# Altium PCB ecupcb.PcbDoc (part 1 of 2)
Units mil, origin at the board's own origin, x right, y up, seen from the top; angles counter-clockwise.
Board outline 2295 x 3625 mil, 2 copper layers (Top Layer, Bottom Layer); 63 components, 47 nets, 207 pads, 33 vias.
Unrouted connection lines stored in the file: 1.
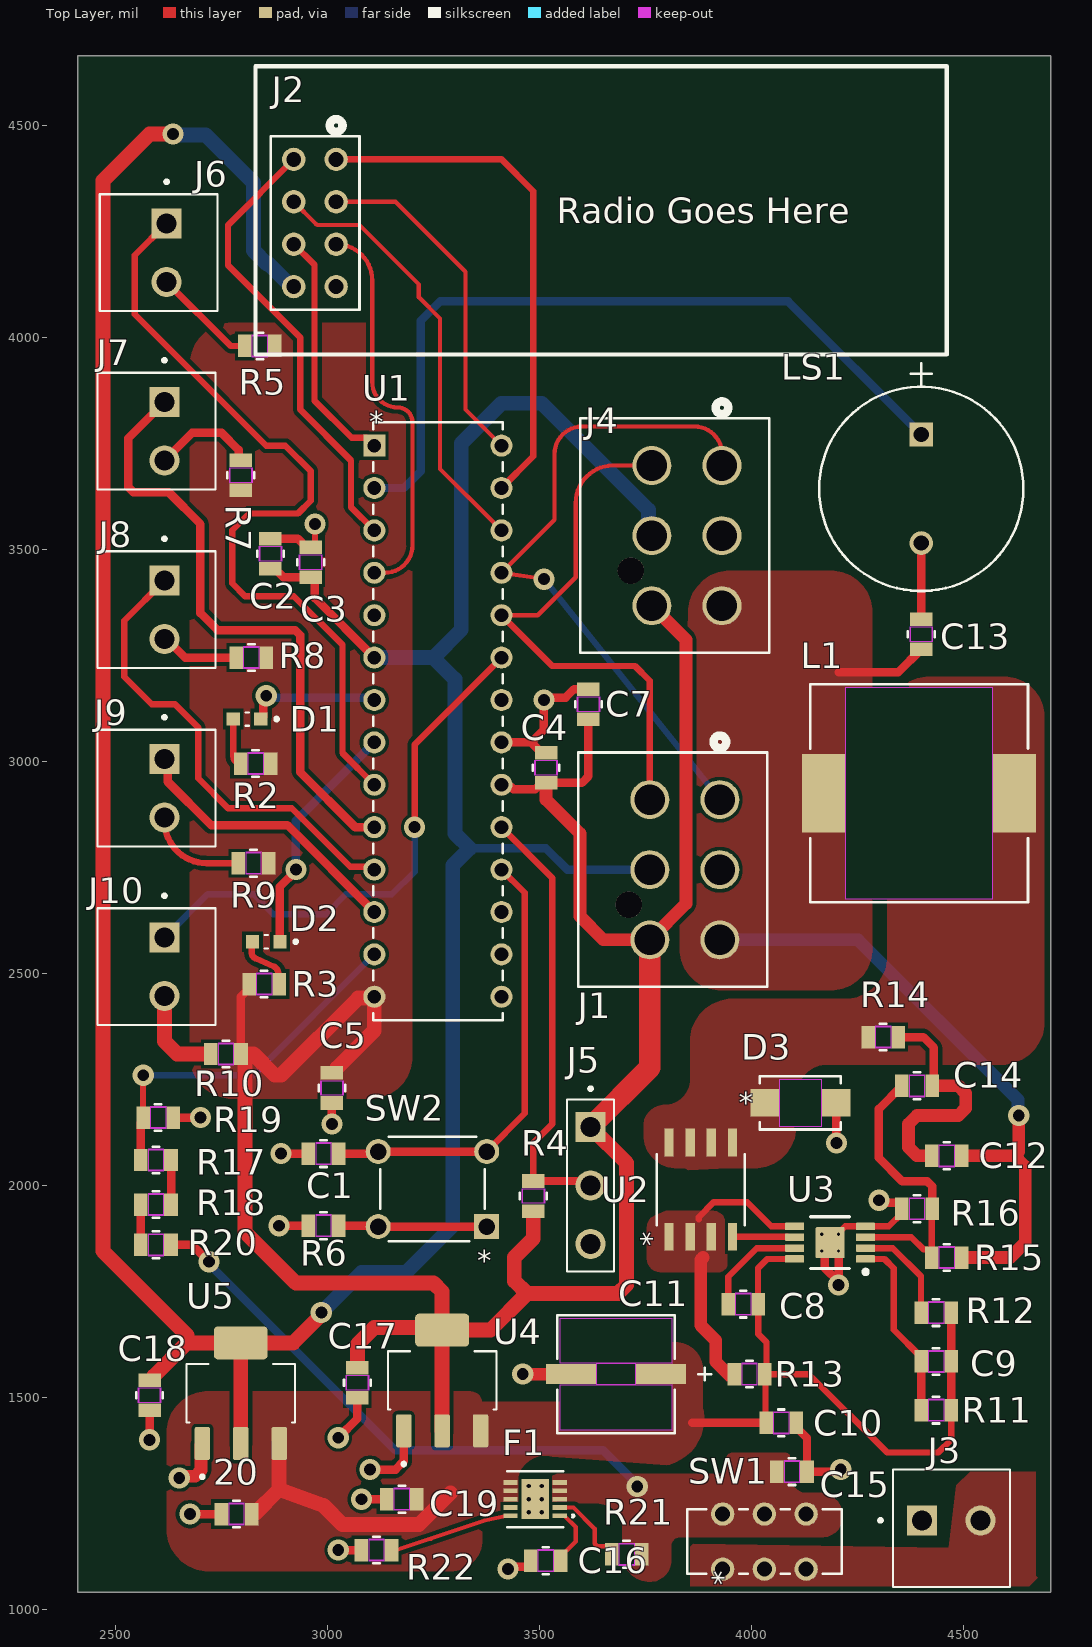
[diagram p0: Top Layer view]
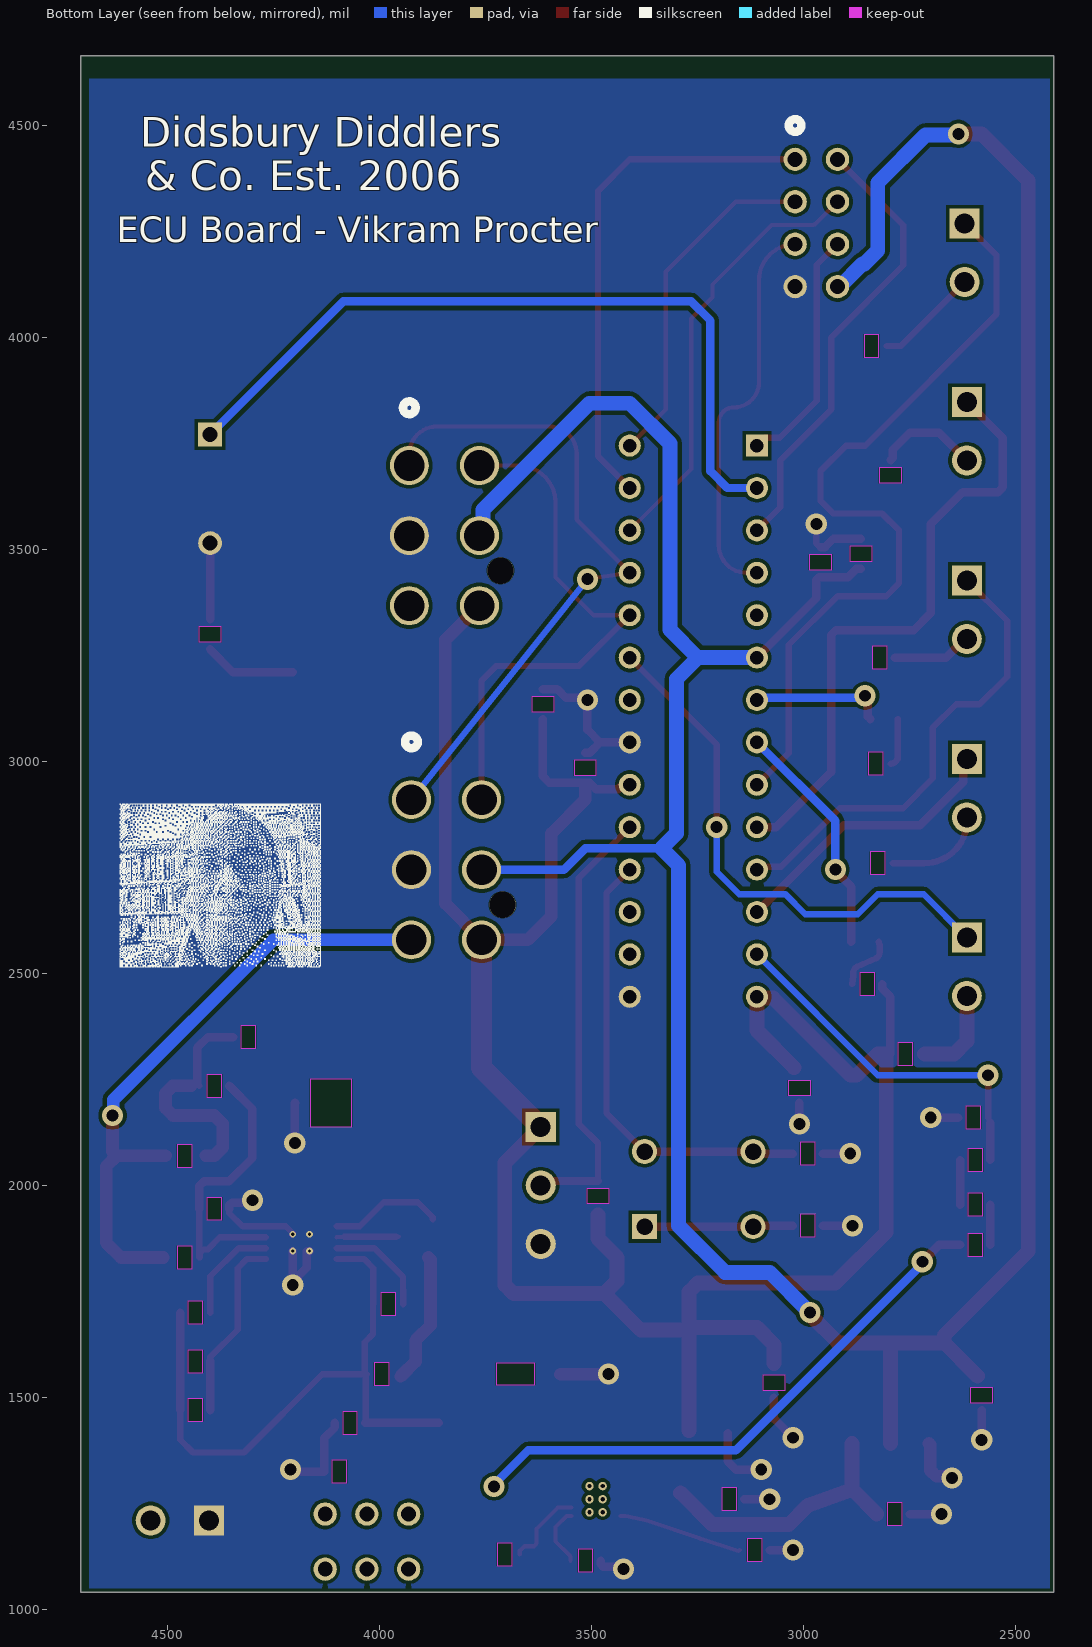
[diagram p1: Bottom Layer view, seen from below]
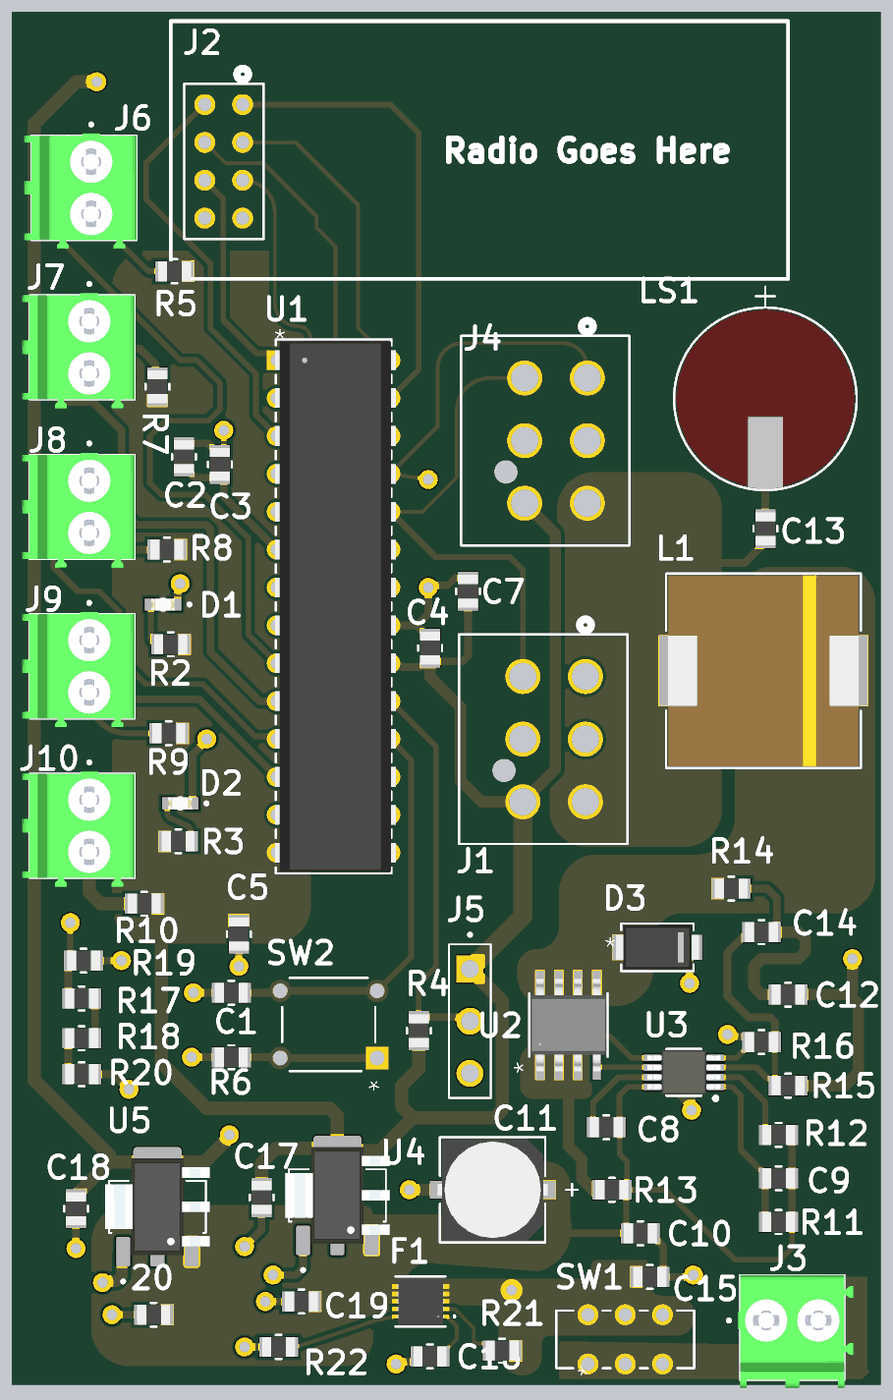
[diagram p2: 3D render of the assembled board from above, using the file's embedded part models]

## Layer stack, top to bottom
Top Solder: solder mask 0.4, Solder Resist, Dk 3.5
Top Layer: signal copper 1.4
Dielectric 1: dielectric 12.6, FR-4, Dk 4.8
Bottom Layer: signal copper 1.4
Bottom Solder: solder mask 0.4, Solder Resist, Dk 3.5

## Board outline
2410,1040 4705,1040 4705,4665 2410,4665

## Design rules (kind name [scope] priority, off if disabled: settings)
Clearance [All] p1: gap=8 ignorepadtopadclearanceinfootprint=TRUE except(1: Arc-Text Track-Text SMDPad-Via SMDPad-Fill SMDPad-Region SMDPad-Text SMDPad-Hole THPad-Text THPad-Hole Via-Text Fill-Fill Fill-Poly Fill-Region Fill-Text Fill-Hole Poly-Poly Poly-Region Poly-Text Poly-Hole Region-Region Region-Text Region-Hole Text-Text Text-Hole; 10: Arc-Poly Track-Poly)
PlaneConnect [All] p1: planeconnectstyle=Direct reliefexpansion=20 reliefentries=4 reliefconductorwidth=10 reliefairgap=10
PolygonConnect [All] p1: connectstyle=Direct reliefconductorwidth=10 reliefentries=4 polygonreliefangle="90 Angle" airgapwidth=10
RoutingVias [All] p1: holewidth=28 width=50 viastyle="Through Hole" minholewidth=28 minwidth=50 maxholewidth=28 maxwidth=50
SilkToSolderMaskClearance [IsPad] p1: minsilkscreentomaskgap=1 clearancetoexposedcopper=FALSE
SolderMaskExpansion [All] p1: expansion=4 istentingtop=FALSE
SupplyNets "Schematic Supply Nets_4" [InNet('GND')] p1: voltage=0.000
SupplyNets "Schematic Supply Nets_3" [InNet('5V')] p2: voltage=0.000
SupplyNets "Schematic Supply Nets_2" [InNet('3V3')] p3: voltage=0.000
SupplyNets "Schematic Supply Nets_1" [InNet('7V2')] p4: voltage=0.000
SupplyNets "Schematic Supply Nets" [InNet('Vbat')] p5: voltage=0.000
Width [All] p1: maxlimit=100 minlimit=10 preferedwidth=15
28 further rules are at their usual default settings.

## Classes and differential pairs
component class PowerSupply: 20 C8 C9 C10 C11 C12 C13 C14 C15 C16 C17 C18 C19 D3 F1 L1 R11 R12 R13 R14 R15 R16 R21 R22 U2 U3 U4 U5
component class ECU: C1 C2 C3 C4 C5 C7 D1 D2 J1 J2 J3 J4 J5 J6 J7 J8 J9 J10 LS1 R2 R3 R4 R5 R6 R7 R8 R9 R10 R17 R18 R19 R20 SW1 SW2 U1

## Components (designator, comment, footprint, x,y, rotation, side; value= is the part's Value field where it differs from the comment)
20 "1uF" "RES 0805" 2785,1225 r0 top
C1 "1uF" "RES 0805" 2990,2075 r180 top
C2 "1uF" "RES 0805" 2865,3490 r270 top
C3 "0.1uF" "RES 0805" 2960,3470 r270 top value=100nF
C4 "1uF" "RES 0805" 3515,2985 r270 top
C5 "1uF" "RES 0805" 3010,2230 r270 top
C7 "0.1uF" "RES 0805" 3615,3135 r270 top value=100nF
C8 "0.47uF" "RES 0805" 3980,1720 r0 top value=470nF
C9 "1000pF" "RES 0805" 4435,1585 r0 top value=1nF
C10 "1uF" "RES 0805" 4070,1440 r180 top
C11 "47uF" "CAP ELC 47uF" 3680,1555 r180 top
C12 "3.9nF" "RES 0805" 4460,2070 r0 top
C13 "22uF" "RES 0805" 4400,3300 r270 top
C14 "0.1uF" "RES 0805" 4390,2235 r0 top value=100nF
C15 "0.1uF" "RES 0805" 4095,1325 r180 top value=100nF
C16 "0.1uF" "RES 0805" 3514.5,1115 r0 top value=100nF
C17 "4.7uF" "RES 0805" 3070,1534.5 r90 top
C18 "4.7uF" "RES 0805" 2580,1505 r90 top
C19 "1uF" "RES 0805" 3175,1260 r0 top
D1 "redSML-D12U1WT86" 0603LED 2810,3100 r180 top
D2 "greenSML-D12P8WT86" 0603LED 2855,2575 r180 top
D3 "40V 5A" "DIODE SCHOTTKY 40V 5A" 4115,2195 r0 top
F1 "FUSE TPS259251DRCR" DRC10_1P65X2P40_TEX 3489.5,1260 r180 top
J1 "Molex2125201006" Molex2125201006 3925,2910 r90 top
J2 "8pos215307-4" 215307-4 3020,4420 r270 top
J3 "ScrewTwo1984617" PHOENIX_1984617 4333.31,1052.52 r0 top
J4 "Molex2125201006" Molex2125201006 3929.96,3698.03 r90 top
J5 "Pos3Header1945106" Pos3Header 3564.88,2202.76 r270 top
J6 "ScrewTwo1984617" PHOENIX_1984617 2462.52,4337.69 r270 top
J7 "ScrewTwo1984617" PHOENIX_1984617 2457.52,3916.69 r270 top
J8 "ScrewTwo1984617" PHOENIX_1984617 2457.52,3495.69 r270 top
J9 "ScrewTwo1984617" PHOENIX_1984617 2457.52,3074.69 r270 top
J10 "ScrewTwo1984617" PHOENIX_1984617 2457.52,2653.69 r270 top
L1 "13uH" "IND 13UH 9A 24 MOHM SMD" 4394.75,2925 r180 top
LS1 "BuzzerCEM-120342" CEM-1203(42) 4400,3770.91 r270 top
R2 "330" "RES 0805" 2830,2995 r180 top value=330R
R3 "330" "RES 0805" 2850,2475 r0 top value=330R
R4 "1.4k" "RES 0805" 3485,1975 r270 top value=1.4kR
R5 "330" "RES 0805" 2840,3980 r0 top value=330R
R6 "330" "RES 0805" 2990,1905 r180 top value=330R
R7 "330" "RES 0805" 2795,3675 r270 top value=330R
R8 "330" "RES 0805" 2820,3245 r0 top value=330R
R9 "330" "RES 0805" 2825,2760 r0 top value=330R
R10 "330" "RES 0805" 2760,2310 r0 top value=330R
R11 "1.4k" "RES 0805" 4435,1470 r0 top value=1.4kR
R12 "142K" "RES 0805" 4435,1700 r0 top
R13 "13m" "RES 0805" 3995,1555 r0 top
R14 "41.2k" "RES 0805" 4310,2350 r0 top
R15 "18.7k" "RES 0805" 4460,1830 r0 top
R16 "3.9k" "RES 0805" 4390,1945 r0 top
R17 "3.9k" "RES 0805" 2595,2060 r180 top value=3.92kR
R18 "18.7k" "RES 0805" 2595,1955 r180 top value=18.7kR
R19 "41.2K" "RES 0805" 2600,2160 r180 top value=41.2kR
R20 "41.2K" "RES 0805" 2595,1860 r0 top value=41.2kR
R21 "1M" "RES 0805" 3705,1130 r0 top value=1MR
R22 "142K" "RES 0805" 3115,1140 r0 top value=142kR
SW1 "SWT JS202011CQN" SWTJS202011CQN 3931.57,1095.08 r90 top
SW2 "Button1825910-6" Button1825910-6 3119.09,2080 r180 top
U1 "AVR128DB28-I/SP" AVR128DB28-ISP 3110,3745 r0 top
U2 "PfetSTS5P3LLH6" STS5P3LLH6 3880,1990 r90 top
U3 "IC BUCK LM25085MYX/NOPB" DGN0008A_L 4185,1865 r180 top
U4 "LDL1117S50R" SOT230P700X180-4N 3270,1540 r90 top
U5 "LDL1117S33R" SOT230P700X180-4N 2795,1510 r90 top

## Footprints (in the part's own frame and the unit in brackets; to place one, negate y for a bottom-side part, rotate by r counter-clockwise, add the part's x,y. Pads: shape width x height; smd on the part's side, far side on the other; paste and mask are expansions set on the pad)
0603LED [mm]
  rect 0.8x0.8 smd: A(0.825,0) C(-0.825,0)
  silkscreen extent -1.87,-0.4 0.11,0.4, body extent -0.8,-0.4 0.8,0.4, height 0.55
215307-4 [mil]
  round 55 / inner round 60 / far side round 55 hole 35 paste-99999 mask+0: 1(0,0) 2(100,0) 3(200,0) 4(300,0) 5(300,-100) 6(200,-100) 7(100,-100) 8(0,-100)
  silkscreen extent -95,-154 355,55
AVR128DB28-ISP [mil]
  rect 52x52 / inner round 60 / far side rect 52x52 hole 32 paste-99999 mask+0: 1(0,0)
  round 52 / inner round 60 / far side round 52 hole 32 paste-99999 mask+0: 2(0,-100) 3(0,-200) 4(0,-300) 5(0,-400) 6(0,-500) 7(0,-600) 8(0,-700) 9(0,-800) 10(0,-900) 11(0,-1000) 12(0,-1100) 13(0,-1200) 14(0,-1300) 15(300,-1300) 16(300,-1200) 17(300,-1100) 18(300,-1000) 19(300,-900) 20(300,-800) 21(300,-700) 22(300,-600) 23(300,-500) 24(300,-400) 25(300,-300) 26(300,-200) 27(300,-100) 28(300,0)
  silkscreen extent -2,-1355 302,55, body extent -5,-1350 314,50, height 205
Button1825910-6 [mil]
  rect 59x59 / inner round 60 / far side rect 59x59 hole 39 paste-99999 mask+0: 1(-255.91,177.17)
  round 59 / inner round 60 / far side round 59 hole 39 paste-99999 mask-29.5: 2(0,177.17) 3(-255.91,0) 4(0,0)
  silkscreen extent -251,-34 -5,212
"CAP ELC 47uF" [mil] "UWT1H470MCL1GS"
  rect 118x47 smd paste+0 mask+2: 1(-106.5,0) 2(106.5,0)
  Top Layer keep-out region: -45.5,-25.5 -45.5,25.5 45.5,25.5 45.5,-25.5
  Top Layer keep-out region: -132,-132 -132,-25.5 132,-25.5 132,-132
  Top Layer keep-out region: -132,25.5 -132,132 132,132 132,25.5
  Keep-Out Layer region: -45.5,-25.5 -45.5,25.5 45.5,25.5 45.5,-25.5
  silkscreen extent -224,-139 139,139, body extent -146,-134 146,134, height 317
CEM-1203(42) [mil]
  rect 56x56 / inner round 60 / far side rect 56x56 hole 36 paste-99999 mask+4: 1(0,0)
  round 56 / inner round 60 / far side round 56 hole 36 paste-99999 mask+4: 2(255.91,0)
  silkscreen extent -168,-241 369,241, body extent -108,-236 365,236, height 336
DGN0008A_L [mm] "TSOP, 8-Leads, Body 3.1x3.1mm, Pitch 0.65mm, Thermal Pad 1.85x1.73mm, IPC High Density"
  rrect22% 1.15x0.45 smd: 1(-2.125,0.975) 2(-2.125,0.325) 3(-2.125,-0.325) 4(-2.125,-0.975) 5(2.125,-0.975) 6(2.125,-0.325) 7(2.125,0.325) 8(2.125,0.975)
  rrect6% 1.73x1.85 smd: 9(0,0)
  silkscreen extent -2.25,-1.55 1.15,1.87, body extent -2.45,-1.5 2.45,1.5, height 0.94
"DIODE SCHOTTKY 40V 5A" [mil] "Diode 40 V 5A Surface Mount DO-214AC (SMA) SK54A-LTP"
  rect 67x65 smd paste+0 mask+2: 1(-84.5,0) 2(84.5,0)
  Top Layer keep-out region: -49,-56 -49,56 49,56 49,-56
  Keep-Out Layer region: -49,-56 -49,56 49,56 49,-56
  silkscreen extent -96,-63 96,63, body extent -110,-58 110,58, height 49
DRC10_1P65X2P40_TEX [mm]
  rect 0.85x0.28 smd paste-0.14 mask+0.025: 1(-1.475,1) 2(-1.475,0.5) 3(-1.475,0) 4(-1.475,-0.5) 5(-1.475,-1) 6(1.475,-1) 7(1.475,-0.5) 8(1.475,0) 9(1.475,0.5) 10(1.475,1)
  rect 1.65x2.4 smd paste-1.187 mask-1.181: 11(0,0)
  round 0.508 / inner round 1.524 / far side round 0.508 hole 0.254 paste-2539.97 mask-0.254: V(-0.394,0.787) V(-0.394,0) V(-0.394,-0.787) V(0.394,0.787) V(0.394,0) V(0.394,-0.787)
  Top Layer region: 0,1.2 0,1.2 0,1.2 0,1.2 0,1.2 0,1.2 0,1.2 0,1.2
  Top Layer region: 0,-1.2 0,-1.2 0,-1.2 0,-1.2 0,-1.2 0,-1.2 0,-1.2 0,-1.2
  silkscreen extent -2.33,-1.68 1.68,1.68, body extent -1.55,-1.55 1.55,1.55, height 1
"IND 13UH 9A 24 MOHM SMD" [mil] "13 µH Shielded Molded Inductor 9 A 24mOhm Max Nonstandard"
  rect 100.5x185 smd paste+0 mask+2: 1(-225.25,0) 2(225.25,0)
  Top Layer keep-out region: -173,-250 -173,250 173,250 173,-250
  silkscreen extent -257,-257 257,257, body extent -252,-252 252,252, height 28
Molex2125201006 [mil]
  round 92 / inner round 60 / far side round 92 hole 72 paste-99999 mask+0: 1(0,0) 2(-165.35,0) 3(-330.71,0) 4(0,165.35) 5(-165.35,165.35) 6(-330.71,165.35)
  round 62 / inner round 60 / far side round 62 hole 62 unplated paste-99999 mask-31: 7(-248.03,214.96)
  silkscreen extent -442,-111 151,334
PHOENIX_1984617 [mm]
  rect 1.8x1.8 / inner round 1.8 / far side rect 1.8x1.8 hole 1.2: 1(1.75,4)
  round 1.8 hole 1.2: 2(5.25,4)
  silkscreen extent -0.85,0 7,7.05, body extent -0.13,-0.5 7.57,7.05, height 9.3
Pos3Header [mm]
  rect 1.8x1.8 / inner round 1.8 / far side rect 1.8x1.8 hole 1.2: 01(1.65,1.4)
  round 1.8 hole 1.2: 02(5.15,1.4) 03(8.65,1.4)
  silkscreen extent -0.75,0 10.3,2.8
"RES 0805" [mil]
  rect 32x53 smd paste+0 mask+2: 1(-35.5,0) 2(35.5,0)
  Top Layer keep-out region: -17.5,-24.5 -17.5,24.5 17.5,24.5 17.5,-24.5
  Keep-Out Layer region: -17.5,-26.5 -17.5,26.5 17.5,26.5 17.5,-26.5
  silkscreen extent -7,-32 7,32, body extent -44,-26 44,26, height 26
SOT230P700X180-4N [mm]
  rrect25% 1.98x0.93 smd: 1(-3.015,2.3) 2(-3.015,0) 3(-3.015,-2.3)
  rrect25% 1.98x3.23 smd: 4(3.015,0)
  silkscreen extent -5.1,-3.25 1.75,3.25, body extent -3.25,-3.5 3.25,3.5, height 1.8
STS5P3LLH6 [mil] "P-Channel 30 V 5A (Ta) 2.7W (Ta) Surface Mount 8-SOIC"
  rect 65.5x22 smd paste+0 mask+2: 1(-111.25,75) 2(-111.25,25) 3(-111.25,-25) 4(-111.25,-75) 5(111.25,-75) 6(111.25,-25) 7(111.25,25) 8(111.25,75)
  silkscreen extent -84,-104 84,104, body extent -122,-99 122,99, height 69
SWTJS202011CQN [mil]
  round 55 / inner round 60 / far side round 55 hole 35 paste-99999 mask+0: 1(0,0) 2(0,-98.43) 3(0,-196.85) 4(129.92,-196.85) 5(129.92,-98.43) 6(129.92,0)
  silkscreen extent -11,-280 141,84

## Part data
20 C1 C2 C4 C5 C10 C19: library part "CAP CER 1uF 10% 50V 0805", "Ceramic Capacitor, Multilayer, Ceramic, 50V, 10% +Tol, 10% -Tol, X7R, 15% TC, 1uF, Surface Mount, 0805", Capacitor Type=Ceramic, Case/Package=0805, Manufacturer=Samsung, Manufacturer Part Number=CL21B105KBFNNNE, Max Operating Temperature=125°C, Min Operating Temperature=-55°C, Package Shape=Rectangular, Package Style=SMTMeter, Rated DC Voltage (URdc)=50V, Supplier Part Number=1276-1029-1-ND, Temperature Characteristics Code=X7R, Tolerance  (fill in as +-)=10%, Category="Ceramic Capacitors", ComponentLink1Description=https://datasheet.ciiva.com:443/pdfs/VipMasterIC/IC/SEMS/SEMS-S-A0008524728/SEMS-S-A0008523023-1.pdf?src-supplier=IHS+Markit, ComponentLink1URL=https://datasheet.ciiva.com:443/pdfs/VipMasterIC/IC/SEMS/SEMS-S-A0008524728/SEMS-S-A0008523023-1.pdf?src-supplier=IHS+Markit, ComponentLink2Description=https://datasheet.ciiva.com/25800/cl21b105kbfnnne-25800291.pdf?src-supplier=Digikey, ComponentLink2URL=https://datasheet.ciiva.com/25800/cl21b105kbfnnne-25800291.pdf?src-supplier=Digikey, ComponentLink3Description=https://datasheet.ciiva.com/16449/cl21b105kbfnnne-16449003.pdf?src-supplier=Future+Electronics, ComponentLink3URL=https://datasheet.ciiva.com/16449/cl21b105kbfnnne-16449003.pdf?src-supplier=Future+Electronics, Dielectric Material=Ceramic, Height=1.35mm, JESD-609 Code=e3, Length=2mm, Mounting Technology="Surface Mount", Multilayer=Yes, Packaging="Tape and Reel", Pins=2, Pricing="1=0.1, 10=0.051, 100=0.0321, 1000=0.02181 (USD)", Reach SVHC Compliant=Yes, RoHS=Yes, RoHS Compliant=Yes, Stock=572828, Supplier=Digikey, Terminal Finish=Nickel, Termination=Wraparound, Tolerance (fill in as +-)=10%, Width=1.25mm
C3 C7 C14 C15 C16: library part "CAP CER 0.1uF 10% 50V 0805", "Ceramic Capacitor, Multilayer, Ceramic, 50V, 10% +Tol, 10% -Tol, X7R, 15% TC, 0.1uF, Surface Mount, 0805", Capacitor Type=Ceramic, Case/Package=0805, Manufacturer=Yageo, Manufacturer Part Number=CC0805KRX7R9BB104, Max Operating Temperature=125°C, Min Operating Temperature=-55°C, Package Shape=Rectangular, Package Style=SMTMeter, Rated DC Voltage (URdc)=50V, Supplier Part Number=311-1140-1-ND, Temperature Characteristics Code=X7R, Tolerance  (fill in as +-)=10%, Category="Ceramic Capacitors", ComponentLink1Description=https://datasheet.ciiva.com:443/pdfs/VipMasterIC/IC/YAGO/YAGO-S-A0003557223/YAGO-S-A0003557223-1.pdf?src-supplier=IHS+Markit, ComponentLink1URL=https://datasheet.ciiva.com:443/pdfs/VipMasterIC/IC/YAGO/YAGO-S-A0003557223/YAGO-S-A0003557223-1.pdf?src-supplier=IHS+Markit, ComponentLink2Description=https://datasheet.ciiva.com/11786/0900766b80d84f1d-11786009.pdf?src-supplier=Rs, ComponentLink2URL=https://datasheet.ciiva.com/11786/0900766b80d84f1d-11786009.pdf?src-supplier=Rs, ComponentLink3Description=https://datasheet.ciiva.com/155/mlccorderingcode-155929.pdf?src-supplier=Digikey, ComponentLink3URL=https://datasheet.ciiva.com/155/mlccorderingcode-155929.pdf?src-supplier=Digikey, ComponentLink4Description=https://datasheet.ciiva.com/155/mlccorderingcode-155930.pdf?src-supplier=Digikey, ComponentLink4URL=https://datasheet.ciiva.com/155/mlccorderingcode-155930.pdf?src-supplier=Digikey, ComponentLink5Description=https://datasheet.ciiva.com/155/mlccorderingcode-155931.pdf?src-supplier=Digikey, ComponentLink5URL=https://datasheet.ciiva.com/155/mlccorderingcode-155931.pdf?src-supplier=Digikey, ComponentLink6Description=https://datasheet.ciiva.com/46393/1734573-46393307.pdf?src-supplier=Element14, ComponentLink6URL=https://datasheet.ciiva.com/46393/1734573-46393307.pdf?src-supplier=Element14, ComponentLink7Description=https://datasheet.ciiva.com/28450/1489800-28450805.pdf?src-supplier=Element14, ComponentLink7URL=https://datasheet.ciiva.com/28450/1489800-28450805.pdf?src-supplier=Element14, ComponentLink8Description=https://datasheet.ciiva.com/11464/upy-gphc-x7r-6-3v-to-50v-8-11464757.pdf?src-supplier=Avnet, ComponentLink8URL=https://datasheet.ciiva.com/11464/upy-gphc-x7r-6-3v-to-50v-8-11464757.pdf?src-supplier=Avnet, ComponentLink9Description=https://datasheet.ciiva.com/29242/445210-da-01-en-kerko-chip-0805-x7r-0-1uf-10proz-50vg-29242074.pdf?src-supplier=Conrad, ComponentLink9URL=https://datasheet.ciiva.com/29242/445210-da-01-en-kerko-chip-0805-x7r-0-1uf-10proz-50vg-29242074.pdf?src-supplier=Conrad, Dielectric Material=Ceramic, Height=0.85mm, JESD-609 Code=e3, Length=2mm, Mounting Technology="Surface Mount", Multilayer=Yes, Packaging="Tape and Reel", Pins=2, Pricing="1=0.08, 10=0.021, 100=0.0152, 1000=0.0144, 4000=0.0112, 8000=0.0104, 12000=0.01, 20000=0.00985 (USD)", Reach SVHC Compliant=Yes, RoHS=Yes, RoHS Compliant=Yes, Stock=3691132, Supplier=Digikey, Terminal Finish=Nickel, Termination=Wraparound, Tolerance (fill in as +-)=10%, Width=1.25mm
C8: library part "CAP CER 0.47uF 10% 50V 0805", "Ceramic Capacitor, Multilayer, Ceramic, 50V, 10% +Tol, 10% -Tol, X7R, 15% TC, 0.47uF, Surface Mount, 0805", Capacitor Type=Ceramic, Case/Package=0805, Manufacturer=Murata, Manufacturer Part Number=GRM21BR71H474KA88L, Max Operating Temperature=125°C, Min Operating Temperature=-55°C, Package Shape=Rectangular, Package Style=SMTMeter, Rated DC Voltage (URdc)=50V, Supplier Part Number=81-GRM21BR71H474KA88, Temperature Characteristics Code=X7R, Tolerance  (fill in as +-)=10%, Category="Ceramic Capacitors", ComponentLink1Description=https://datasheet.ciiva.com:443/pdfs/VipMasterIC/IC/MURE/MURE-S-A0008911154/MURE-S-A0008911261-1.pdf?src-supplier=IHS+Markit, ComponentLink1URL=https://datasheet.ciiva.com:443/pdfs/VipMasterIC/IC/MURE/MURE-S-A0008911154/MURE-S-A0008911261-1.pdf?src-supplier=IHS+Markit, ComponentLink2Description=https://datasheet.ciiva.com/3777/4932grm21br71h474ka8823-3777215.pdf?src-supplier=Arrow+Electronics, ComponentLink2URL=https://datasheet.ciiva.com/3777/4932grm21br71h474ka8823-3777215.pdf?src-supplier=Arrow+Electronics, ComponentLink3Description=https://datasheet.ciiva.com/11789/0900766b80ef921d-11789192.pdf?src-supplier=Rs, ComponentLink3URL=https://datasheet.ciiva.com/11789/0900766b80ef921d-11789192.pdf?src-supplier=Rs, ComponentLink4Description=https://datasheet.ciiva.com/19476/1859010-19476382.pdf?src-supplier=Jameco, ComponentLink4URL=https://datasheet.ciiva.com/19476/1859010-19476382.pdf?src-supplier=Jameco, ComponentLink5Description=https://datasheet.ciiva.com/29200/453181-da-01-en-vs-kondensator-0805-29200574.pdf?src-supplier=Conrad, ComponentLink5URL=https://datasheet.ciiva.com/29200/453181-da-01-en-vs-kondensator-0805-29200574.pdf?src-supplier=Conrad, ComponentLink6Description=https://datasheet.ciiva.com/137/product-137379.pdf?src-supplier=Digikey, ComponentLink6URL=https://datasheet.ciiva.com/137/product-137379.pdf?src-supplier=Digikey, ComponentLink7Description=https://datasheet.ciiva.com/137/product-137380.pdf?src-supplier=Digikey, ComponentLink7URL=https://datasheet.ciiva.com/137/product-137380.pdf?src-supplier=Digikey, ComponentLink8Description=https://datasheet.ciiva.com/137/product-137381.pdf?src-supplier=Digikey, ComponentLink8URL=https://datasheet.ciiva.com/137/product-137381.pdf?src-supplier=Digikey, ComponentLink9Description=https://datasheet.ciiva.com/14116/grm21br71h474ka88l-eng-tds-14116422.pdf?src-supplier=Distrelec, ComponentLink9URL=https://datasheet.ciiva.com/14116/grm21br71h474ka88l-eng-tds-14116422.pdf?src-supplier=Distrelec, ComponentLink10Description=https://datasheet.ciiva.com/16357/product-16357717.pdf?src-supplier=Future+Electronics, ComponentLink10URL=https://datasheet.ciiva.com/16357/product-16357717.pdf?src-supplier=Future+Electronics, Dielectric Material=Ceramic, Height=1.25mm, JESD-609 Code=e3, Length=2mm, Mounting Technology="Surface Mount", Multilayer=Yes, Packaging="Tape and Reel", Pins=2, Pricing="1=0.19, 10=0.114, 50=0.114, 100=0.08, 1000=0.057, 10000=0.036 (USD)", Reach SVHC Compliant=Yes, RoHS=Yes, RoHS Compliant=Yes, Stock=177825, Supplier=Mouser, Terminal Finish=Nickel, Termination=Wraparound, Tolerance (fill in as +-)=10%, Width=1.25mm
C9: library part "CAP CER 1000pF 10% 50V 0805", "Ceramic Capacitor, Multilayer, Ceramic, 50V, 10% +Tol, 10% -Tol, X7R, 15% TC, 0.001uF, Surface Mount, 0805", Capacitor Type=Ceramic, Case/Package=0805, Manufacturer=KEMET, Manufacturer Part Number=C0805C102K5RACTU, Max Operating Temperature=125°C, Min Operating Temperature=-55°C, Package Shape=Rectangular, Rated DC Voltage (URdc)=50V, Temperature Characteristics Code=X7R, Tolerance  (fill in as +-)=10%, Category="Ceramic Capacitors", ComponentLink1Description=http://capacitoredge.kemet.com:80/capedge2/intellispec.jsp?pn=C0805C102K5RACTU&displayPN=C0805C102K5RACTU&src-supplier=IHS+Markit, ComponentLink1URL=http://capacitoredge.kemet.com:80/capedge2/intellispec.jsp?pn=C0805C102K5RACTU&displayPN=C0805C102K5RACTU&src-supplier=IHS+Markit, ComponentLink2Description=https://datasheet.ciiva.com/18193/getdatasheetpartid-385640-18193338.pdf?src-supplier=Verical, ComponentLink2URL=https://datasheet.ciiva.com/18193/getdatasheetpartid-385640-18193338.pdf?src-supplier=Verical, ComponentLink3Description=https://datasheet.ciiva.com/7842/1918693-7842527.pdf?src-supplier=Element14, ComponentLink3URL=https://datasheet.ciiva.com/7842/1918693-7842527.pdf?src-supplier=Element14, ComponentLink4Description=https://datasheet.ciiva.com/39122/docfinderpartnumberc0402c102k5ractu-39122922.pdf?src-supplier=Onlinecomponents.com, ComponentLink4URL=https://datasheet.ciiva.com/39122/docfinderpartnumberc0402c102k5ractu-39122922.pdf?src-supplier=Onlinecomponents.com, Dielectric Material=Ceramic, JESD-609 Code=e3, Mounting Technology="Surface Mount", Multilayer=Yes, Packaging="Tape and Reel", Pins=2, Pricing="4000=0.0176, 8000=0.0114 (USD)", Reach SVHC Compliant=Yes, RoHS=Yes, RoHS Compliant=Yes, Stock=1152000, Supplier="Arrow Electronics", Supplier Part Number=C0805C102K5RACTU, Terminal Finish=Nickel, Termination=Wraparound, Tolerance (fill in as +-)=10%
C11: library part "CAP ELCALUM 47uF 20% 50V", "Aluminum Electrolytic Capacitor, Polarized, Aluminum (wet), 50V, 20% +Tol, 20% -Tol, 47uF, Surface Mount, 2626"
C12: library part "CAP CER 3.9nF 10% 50V 0805", "Ceramic Capacitor, Multilayer, Ceramic, 50V, 10% +Tol, 10% -Tol, X7R, 15% TC, 0.0039uF, Surface Mount, 0805"
C13: library part "CAP CER 22uF 20% 25V 0805", "Ceramic Capacitor, Multilayer, Ceramic, 25V, 20% +Tol, 20% -Tol, X5R, 15% TC, 22uF, Surface Mount, 0805"
C17 C18: library part "CAP CER 4.7uF 10% 25V 0805", "Ceramic Capacitor, Multilayer, Ceramic, 25V, 10% +Tol, 10% -Tol, X5R, 15% TC, 4.7uF, Surface Mount, 0805", ComponentLink1Description=https://www.digikey.ca/en/products/detail/samsung-electro-mechanics/CL21A475KAQNNNE/3886902
D1: "Single Color LED, Red, Milky White, 1.2mm", Color=Red, Forward Current=20mA, Manufacturer=Rohm, Manufacturer Part Number=SML-D12U1WT86, Max Operating Temperature=85°C, Min Operating Temperature=-40°C, Supplier Part Number=SML-D12U1WT86CT-ND, Category=LEDs, Channels=1, ComponentLink1Description=https://datasheet.ciiva.com:443/pdfs/VipMasterIC/IC/ROHM/ROHM-S-A0002134492/ROHM-S-A0002134492-1.pdf?src-supplier=IHS+Markit, ComponentLink1URL=https://datasheet.ciiva.com:443/pdfs/VipMasterIC/IC/ROHM/ROHM-S-A0002134492/ROHM-S-A0002134492-1.pdf?src-supplier=IHS+Markit, ComponentLink2Description=https://www.rohm.com/datasheet/SML-D12U1W?src-supplier=Digikey, ComponentLink2URL=https://www.rohm.com/datasheet/SML-D12U1W?src-supplier=Digikey, ComponentLink3Description=https://datasheet.octopart.com/SML-D12U1WT86-Rohm-datasheet-68298509.pdf?src-supplier=Future+Electronics, ComponentLink3URL=https://datasheet.octopart.com/SML-D12U1WT86-Rohm-datasheet-68298509.pdf?src-supplier=Future+Electronics, ComponentLink4Description=https://datasheet.octopart.com/SML-D12U1WT86-ROHM-datasheet-142144710.pdf?src-supplier=TME, ComponentLink4URL=https://datasheet.octopart.com/SML-D12U1WT86-ROHM-datasheet-142144710.pdf?src-supplier=TME, Lens Style="MILKY WHITE", Luminous Intensity-Nom=63mcd, Mounting Technology="Surface Mount", Optoelectronic Device Type="SINGLE COLOR LED", Overall Height=0.55mm, Packaging="Tape and Reel", Pins=2, Pricing="1=0.12, 10=0.081, 100=0.0556, 500=0.0438, 1000=0.03986 (USD)", Reach SVHC Compliant=Yes, RoHS=Yes, RoHS Compliant=Yes, Shape=Rectangular, Size=1.2mm, Stock=145541, Supplier=Digikey, Terminal Pitch=1.65mm
D2: "Single Color LED, Pure Green, Diffused Milky White, 1.2mm", Color=Green, Forward Current=20mA, Manufacturer=Rohm, Manufacturer Part Number=SML-D12P8WT86, Max Operating Temperature=85°C, Min Operating Temperature=-40°C, Reverse Voltage-Max=5V, Supplier Part Number=846-SML-D12P8WT86CT-ND, Category=LEDs, Channels=1, Color@wavelength=Green, ComponentLink1Description=https://datasheet.ciiva.com:443/pdfs/VipMasterIC/IC/ROHM/ROHMS10041/ROHMS10041-1.pdf?src-supplier=IHS+Markit, ComponentLink1URL=https://datasheet.ciiva.com:443/pdfs/VipMasterIC/IC/ROHM/ROHMS10041/ROHMS10041-1.pdf?src-supplier=IHS+Markit, ComponentLink2Description=https://datasheet.ciiva.com/2110/sml-d1-2110417.pdf?src-supplier=Digikey, ComponentLink2URL=https://datasheet.ciiva.com/2110/sml-d1-2110417.pdf?src-supplier=Digikey, ComponentLink3Description=https://datasheet.ciiva.com/16488/rohm20sml-d12p8wt86-16488100.pdf?src-supplier=Future+Electronics, ComponentLink3URL=https://datasheet.ciiva.com/16488/rohm20sml-d12p8wt86-16488100.pdf?src-supplier=Future+Electronics, ComponentLink4Description=https://datasheet.ciiva.com/2110/sml-d1-2110418.pdf?src-supplier=Digikey, ComponentLink4URL=https://datasheet.ciiva.com/2110/sml-d1-2110418.pdf?src-supplier=Digikey, ComponentLink5Description=https://datasheet.ciiva.com/2110/sml-d1-2110419.pdf?src-supplier=Digikey, ComponentLink5URL=https://datasheet.ciiva.com/2110/sml-d1-2110419.pdf?src-supplier=Digikey, ComponentLink6Description=https://datasheet.ciiva.com/3161/sml-d1-3161420.pdf?src-supplier=Avnet, ComponentLink6URL=https://datasheet.ciiva.com/3161/sml-d1-3161420.pdf?src-supplier=Avnet, JESD-609 Code=e4, Lens Style=Diffused, Luminous Intensity-Nom=6.3mcd, Mounting Technology="Surface Mount", Optoelectronic Device Type="SINGLE COLOR LED", Overall Height=0.55mm, Packaging="Tape and Reel", Pins=2, Pricing="1=0.14, 10=0.094, 100=0.0648, 500=0.05124, 1000=0.04672 (USD)", Reach SVHC Compliant=Yes, RoHS=Yes, RoHS Compliant=Yes, Shape=Rectangular, Size=1.2mm, Stock=24850, Supplier=Digikey, Terminal Finish=Gold, Terminal Pitch=1.65mm
D3: library part "DIODE SCHOTTKY 40V 5A", "Rectifier Diode, Schottky, 1 Phase, 1 Element, 5A, 40V V(RRM), Silicon, DO-214AC", Forward Voltage=550mV, Manufacturer=MCC, Manufacturer Part Number=SK54A-LTP, Max Operating Temperature=150°C, Max Output current=5A, Max Reverse Current=1mA, Min Operating Temperature=-55°C, Non-rep Pk Forward Current-Max=100A, Package Body Material=Plastic, Package Shape=Rectangular, Package Style="SMALL OUTLINEMeter", Peak Reflow Temperature (Cel)=260°C, Rep Pk Reverse Voltage-Max=40V, Supplier Part Number=SK54A-LTPMSCT-ND, Time @ Peak Reflow Temperature-Max (s)=10s, Application(s)="GENERAL PURPOSE", Category="Rectifier Diodes", ComponentLink1Description=https://datasheet.ciiva.com:443/pdfs/VipMasterIC/IC/MCCC/MCCC-S-A0009699019/MCCC-S-A0009699019-1.pdf?src-supplier=IHS+Markit, ComponentLink1URL=https://datasheet.ciiva.com:443/pdfs/VipMasterIC/IC/MCCC/MCCC-S-A0009699019/MCCC-S-A0009699019-1.pdf?src-supplier=IHS+Markit, ComponentLink2Description=http://www.mccsemi.com/up_pdf/SK52A-L-SK510A-L(DO-214AC).pdf?src-supplier=Digikey, ComponentLink2URL=http://www.mccsemi.com/up_pdf/SK52A-L-SK510A-L(DO-214AC).pdf?src-supplier=Digikey, ComponentLink3Description=https://datasheet.octopart.com/SK54A-LTP-Micro-Commercial-datasheet-137977739.pdf?src-supplier=Future+Electronics, ComponentLink3URL=https://datasheet.octopart.com/SK54A-LTP-Micro-Commercial-datasheet-137977739.pdf?src-supplier=Future+Electronics, Diode Element Material=SILICON, Diode Type=RECTIFIER, JEDEC-95 Code=DO-214AC, JESD-30 Code=R-PDSO-C2, Moisture Sensitivity Level=1, Number of Elements=1, Number of Phases=1, Pins=2, Pricing="1=0.33, 10=0.243, 100=0.1933, 500=0.14502, 1000=0.10466, 2000=0.10359 (USD)", Reach SVHC Compliant=No, RoHS=Yes, RoHS Compliant=Yes, Stock=28291, Supplier=Digikey, Surface Mount=Yes, Technology=SCHOTTKY, Terminal Form="C BEND", Terminal Position=DUAL
F1: "Power Supply Support Circuit, Adjustable, 1 Channel, PDSO10", Case/Package=HVSON, Manufacturer="Texas Instruments", Manufacturer Part Number=TPS259251DRCR, Max Operating Temperature=85°C, Max Supply Voltage=5.5V, Min Operating Temperature=-40°C, Min Supply Voltage=4.5V, Nominal Supply Voltage=5V, Package Body Material=Plastic, Package Shape=Square, Package Style="SMALL OUTLINE, HEAT SINK/SLUG, VERY THIN PROFILEMeter", Supplier Part Number=296-47233-1-ND, Temperature Grade=INDUSTRIAL, Adjustable Threshold=Yes, Category="Integrated Circuits (ICs)", Channels=1, ComponentLink1Description=https://www.ti.com:443/lit/ds/symlink/tps25925.pdf?src-supplier=IHS+Markit, ComponentLink1URL=https://www.ti.com:443/lit/ds/symlink/tps25925.pdf?src-supplier=IHS+Markit, ComponentLink2Description=http://www.ti.com/lit/ds/symlink/tps25925.pdf?src-supplier=Digikey, ComponentLink2URL=http://www.ti.com/lit/ds/symlink/tps25925.pdf?src-supplier=Digikey, ComponentLink3Description=http://www.ti.com/general/docs/suppproductinfo.tsp?distId=10&amp;gotoUrl=http%3A%2F%2Fwww.ti.com%2Flit%2Fgpn%2Ftps25925&src-supplier=Digikey, ComponentLink3URL=http://www.ti.com/general/docs/suppproductinfo.tsp?distId=10&amp;gotoUrl=http%3A%2F%2Fwww.ti.com%2Flit%2Fgpn%2Ftps25925&src-supplier=Digikey, ComponentLink4Description=http://www.ti.com/general/docs/lit/getliterature.tsp?genericPartNumber=TPS25925&&fileType=pdf&src-supplier=Avnet, ComponentLink4URL=http://www.ti.com/general/docs/lit/getliterature.tsp?genericPartNumber=TPS25925&&fileType=pdf&src-supplier=Avnet, ComponentLink5Description=http://www.ti.com/lit/gpn/tps25925?src-supplier=Mouser, ComponentLink5URL=http://www.ti.com/lit/gpn/tps25925?src-supplier=Mouser, Height - Seated (Max)=1mm, JESD-30 Code=S-PDSO-N10, JESD-609 Code=e4, Length=3mm, Moisture Sensitivity Level=2, Number of Channels=1, Pins=10, Pricing="1=1.39, 10=1.09, 100=0.767, 500=0.624, 1000=0.577 (USD)", Reach SVHC Compliant=Yes, RoHS=Yes, RoHS Compliant=Yes, Stock=4315, Supplier=Digikey, Surface Mount=Yes, Terminal Finish=Nickel, Terminal Form="No Lead", Terminal Pitch=0.5mm, Terminal Position=DUAL, Throw Configuration="POWER SUPPLY SUPPORT CIRCUIT", Width=3mm
J1 J4: "Connector Power Header 6 Position 4.2mm Solder Through Hole Tray", Manufacturer=Molex, Manufacturer Part Number=212520-1006, Category=Connectors, Pricing="1=1.083 (USD)", RoHS=No, Stock=2143, Supplier="Arrow Electronics", Supplier Part Number=212520-1006
J2: "Board Connector, 4 Contact(s), 2 Row(s), Female, Straight, 0.1 inch Pitch, Solder Terminal, Black Insulator, Receptacle", Dielectric Withstanding Voltage (AC)=750V, Flammability Rating="UL94 V-0", Insulation Color=Green, Insulation Resistance=5GR, Manufacturer="TE Connectivity", Manufacturer Part Number=215307-4, Max Operating Temperature=125°C, Min Operating Temperature=-65°C, Supplier Part Number=98K6517, Body Breadth=0.199inch, Body Depth=0.276inch, Body/Shell Style=RECEPTACLE, Category="Headers and Wire Housings", ComponentLink1Description=https://www.te.com:443/usa-en/product-215307-4.html?src-supplier=IHS+Markit, ComponentLink1URL=https://www.te.com:443/usa-en/product-215307-4.html?src-supplier=IHS+Markit, ComponentLink2Description=https://datasheet.ciiva.com/30070/2153074-30070134.pdf?src-supplier=Onlinecomponents.com, ComponentLink2URL=https://datasheet.ciiva.com/30070/2153074-30070134.pdf?src-supplier=Onlinecomponents.com, ComponentLink3Description=https://datasheet.ciiva.com/11748/0900766b804f4b20-11748752.pdf?src-supplier=Rs, ComponentLink3URL=https://datasheet.ciiva.com/11748/0900766b804f4b20-11748752.pdf?src-supplier=Rs, ComponentLink4Description=https://datasheet.ciiva.com/29369/001094904-da-01-en-buchsenleiste-2-reihig-0-0215307-4-29369976.pdf?src-supplier=Conrad, ComponentLink4URL=https://datasheet.ciiva.com/29369/001094904-da-01-en-buchsenleiste-2-reihig-0-0215307-4-29369976.pdf?src-supplier=Conrad, ComponentLink5Description=https://datasheet.ciiva.com/6857/eng-cd-215307-d-basefilename-6857485.pdf?src-supplier=Digikey, ComponentLink5URL=https://datasheet.ciiva.com/6857/eng-cd-215307-d-basefilename-6857485.pdf?src-supplier=Digikey, Connector Type="BOARD CONNECTOR", Contact Finish - Mating="NOT SPECIFIED", Contact Finish - Termination="Tin (Sn)", Contact Gender=Female, Contact Material=Bronze, Contact Pattern=RECTANGULAR, Contact Style="BELLOWED TYPE", DIN Conformance=No, Filter Feature=No, IEC Conformance=No, Insulation Material=Glass, JESD-609 Code=e3, Mating Contact Pitch=0.1inch, Mating Contact Row Spacing=0.1inch, MIL Conformance=No, Mixed Contacts=No, Mounting Style=STRAIGHT, Mounting Technology=Board, Number Of Connectors=1, Number of Contacts=8, Number Of PCB Rows=2, Number of Rows Loaded=2, Option="General Purpose", PCB Contact Pattern=RECTANGULAR, PCB Contact Row Spacing=2.54mm, Plating Thickness=31uin, Pricing="1=0.863, 10=0.776, 25=0.761, 50=0.746, 100=0.731 (USD)", Reach SVHC Compliant=Yes, Reference Standard=UL, Reliability=COMMERCIAL, RoHS=Yes, RoHS Compliant=Yes, Stock=250, Supplier=Avnet, Terminal Length=0.118inch, Terminal Pitch=2.54mm, Termination=Solder
J3 J6 J7 J8 J9 J10: "Barrier Strip Terminal Block, 17.5A, 1.5mm2, 1 Row(s), 1 Deck(s)", Current Rating=17.5A, Manufacturer="Phoenix Contact", Manufacturer Part Number=1984617, Supplier Part Number=277-1721-ND, Voltage Rating=200V, Category="Terminal Blocks", ComponentLink1Description=https://datasheet.ciiva.com:443/pdfs/VipMasterIC/IC/PCON/PCON-S-A0001273034/PCON-S-A0001273034-1.pdf?src-supplier=IHS+Markit, ComponentLink1URL=https://datasheet.ciiva.com:443/pdfs/VipMasterIC/IC/PCON/PCON-S-A0001273034/PCON-S-A0001273034-1.pdf?src-supplier=IHS+Markit, ComponentLink2Description=https://datasheet.ciiva.com/15169/getdatasheetpartid-212214-15169950.pdf?src-supplier=Verical, ComponentLink2URL=https://datasheet.ciiva.com/15169/getdatasheetpartid-212214-15169950.pdf?src-supplier=Verical, ComponentLink3Description=https://datasheet.ciiva.com/11758/0900766b811d7588-11758486.pdf?src-supplier=Rs, ComponentLink3URL=https://datasheet.ciiva.com/11758/0900766b811d7588-11758486.pdf?src-supplier=Rs, ComponentLink4Description=https://datasheet.ciiva.com/16070/1984617-16070639.pdf?src-supplier=Onlinecomponents.com, ComponentLink4URL=https://datasheet.ciiva.com/16070/1984617-16070639.pdf?src-supplier=Onlinecomponents.com, ComponentLink5Description=https://datasheet.ciiva.com/3969/1984617-3969923.pdf?src-supplier=Arrow+Electronics, ComponentLink5URL=https://datasheet.ciiva.com/3969/1984617-3969923.pdf?src-supplier=Arrow+Electronics, ComponentLink6Description=https://datasheet.ciiva.com/823/combiconcompactseries-823754.pdf?src-supplier=Digikey, ComponentLink6URL=https://datasheet.ciiva.com/823/combiconcompactseries-823754.pdf?src-supplier=Digikey, Fastening Method=SCREW, Manufacturer Series=1984617, Mounting Technology=Board, Number of Decks=1, Number of Rows=1, Number of Ways=2, Pricing="1=0.62, 10=0.598, 50=0.572, 100=0.5564, 250=0.52, 500=0.4784, 1000=0.442, 2500=0.4225 (USD)", Reach SVHC Compliant=No, RoHS=Yes, RoHS Compliant=Yes, Safety Approval=UL,CUL,EAC, Stock=1429, Supplier=Digikey, Terminal and Terminal Block Type="BARRIER STRIP TERMINAL BLOCK", Wire Cross Section=1.5mm2, Wire/Cable Gauge=16AWG
J5: "Board Connector, 3 Contact(s), 1 Row(s), Male, Straight, Solder Terminal, Black Insulator"
L1: library part "IND 13uH 9A", "General Purpose Inductor, 13uH, 20%, 1 Element, SMD, 5550"
LS1: "Audio Signaling/Alarm Devices", Manufacturer="CUI Devices", Manufacturer Part Number=CEM-1203(42), Category=Buzzers, ComponentLink1Description=https://www.cuidevices.com/product/resource/digikeypdf/cem-1203-42-.pdf?src-supplier=Digikey, ComponentLink1URL=https://www.cuidevices.com/product/resource/digikeypdf/cem-1203-42-.pdf?src-supplier=Digikey, ComponentLink2Description=https://datasheet.octopart.com/CEM-1203%2842%29-CUI-Devices-datasheet-175926661.pdf?src-supplier=Future+Electronics, ComponentLink2URL=https://datasheet.octopart.com/CEM-1203%2842%29-CUI-Devices-datasheet-175926661.pdf?src-supplier=Future+Electronics, ComponentLink3Description=https://datasheet.octopart.com/CEM-1203%2842%29-Same-Sky-datasheet-182879445.pdf?src-supplier=Electro+Sonic, ComponentLink3URL=https://datasheet.octopart.com/CEM-1203%2842%29-Same-Sky-datasheet-182879445.pdf?src-supplier=Electro+Sonic, ComponentLink4Description=https://datasheet.octopart.com/CEM-1203%2842%29-CUI-Devices-datasheet-175925305.pdf?src-supplier=Master+Electronics, ComponentLink4URL=https://datasheet.octopart.com/CEM-1203%2842%29-CUI-Devices-datasheet-175925305.pdf?src-supplier=Master+Electronics, Pricing="1=0.5383, 10=0.4658, 25=0.4267, 40=0.4109, 80=0.3857, 230=0.3659, 500=0.365 (USD)", RoHS=Yes, Stock=12257, Supplier="Arrow Electronics", Supplier Part Number=CEM-1203(42)
R2 R3 R5 R6 R7 R8 R9 R10: library part "RES 330 1% 0.125W 0805", "Fixed Resistor, Metal Glaze/thick Film, 0.125W, 330ohm, 150V, 1% +/-Tol, 100ppm/Cel, Surface Mount, 0805", Case/Package=0805, Manufacturer="Stackpole Electronics", Manufacturer Part Number=RMCF0805FT330R, Max Operating Temperature=155°C, Min Operating Temperature=-55°C, Package Height=0.5mm, Package Length=2mm, Package Shape=Rectangular, Package Width=1.25mm, Power=125mW, Rated Temperature=70°C, Resistor Type="FIXED RESISTOR", Supplier Part Number=RMCF0805FT330RCT-ND, Temperature Coefficient (ppm/Cel)=100, Tolerance=1%, Working Voltage=150V, Category="Chip SMD Resistors", ComponentLink1Description=https://datasheet.ciiva.com:443/pdfs/VipMasterIC/IC/SEIE/SEIE-S-A0009541969/SEIE-S-A0009541969-1.pdf?src-supplier=IHS+Markit, ComponentLink1URL=https://datasheet.ciiva.com:443/pdfs/VipMasterIC/IC/SEIE/SEIE-S-A0009541969/SEIE-S-A0009541969-1.pdf?src-supplier=IHS+Markit, ComponentLink2Description=http://components.arrow.com/part/dataview/40963487S9848862N1174?src-supplier=Arrow+Electronics, ComponentLink2URL=http://components.arrow.com/part/dataview/40963487S9848862N1174?src-supplier=Arrow+Electronics, ComponentLink3Description=https://www.seielect.com/catalog/SEI-RMCF_RMCP.pdf?src-supplier=Avnet, ComponentLink3URL=https://www.seielect.com/catalog/SEI-RMCF_RMCP.pdf?src-supplier=Avnet, ComponentLink4Description=https://www.seielect.com/catalog/sei-rmcf_rmcp.pdf?src-supplier=Digikey, ComponentLink4URL=https://www.seielect.com/catalog/sei-rmcf_rmcp.pdf?src-supplier=Digikey, ComponentLink5Description=https://www.seielect.com/catalog/SEI-Packaging.pdf?src-supplier=Digikey, ComponentLink5URL=https://www.seielect.com/catalog/SEI-Packaging.pdf?src-supplier=Digikey, ComponentLink6Description=https://www.verical.com/server-webapp/html/getDatasheet?partID=559884&src-supplier=Verical, ComponentLink6URL=https://www.verical.com/server-webapp/html/getDatasheet?partID=559884&src-supplier=Verical, ComponentLink7Description=https://datasheet.octopart.com/RMCF0805FT330R-Stackpole-Electronics-datasheet-12534581.pdf?src-supplier=Future+Electronics, ComponentLink7URL=https://datasheet.octopart.com/RMCF0805FT330R-Stackpole-Electronics-datasheet-12534581.pdf?src-supplier=Future+Electronics, Construction=Rectangular, JESD-609 Code=e3, Mounting Technology="Surface Mount", Packaging="Tape and Reel", Pins=2, Pricing="1=0.1, 10=0.025, 100=0.012, 1000=0.00658, 2500=0.00564 (USD)", Reach SVHC Compliant=Yes, Reference Standard=AEC-Q200, RoHS=Yes, RoHS Compliant=Yes, Stock=270482, Supplier=Digikey, Technology="METAL GLAZE/THICK FILM", Terminal Finish=Nickel, Termination=Wraparound
R4 R11: library part "RES 1.4k 1% 0.125W 0805", "Fixed Resistor, Metal Glaze/thick Film, 0.125W, 1400ohm, 150V, 1% +/-Tol, 100ppm/Cel, Surface Mount, 0805", Case/Package=0805, Manufacturer=Yageo, Manufacturer Part Number=RC0805FR-071K4L, Max Operating Temperature=155°C, Min Operating Temperature=-55°C, Package Height=0.5mm, Package Length=2mm, Package Shape=Rectangular, Package Width=1.25mm, Power=125mW, Rated Temperature=70°C, Resistor Type="FIXED RESISTOR", Supplier Part Number=5205166, Temperature Coefficient (ppm/Cel)=100, Tolerance=1%, Working Voltage=150V, Additional Feature="LASER TRIMMABLE", Category="Chip SMD Resistors", ComponentLink1Description=https://datasheet.ciiva.com:443/pdfs/VipMasterIC/IC/YAGO/YAGO-S-A0008145938/YAGO-S-A0008145938-1.pdf?src-supplier=IHS+Markit, ComponentLink1URL=https://datasheet.ciiva.com:443/pdfs/VipMasterIC/IC/YAGO/YAGO-S-A0008145938/YAGO-S-A0008145938-1.pdf?src-supplier=IHS+Markit, ComponentLink2Description=https://datasheet.ciiva.com/2519/pyu-r-int-thick-7-2519780.pdf?src-supplier=Digikey, ComponentLink2URL=https://datasheet.ciiva.com/2519/pyu-r-int-thick-7-2519780.pdf?src-supplier=Digikey, ComponentLink3Description=https://datasheet.ciiva.com/2519/pyu-r-int-thick-7-2519781.pdf?src-supplier=Digikey, ComponentLink3URL=https://datasheet.ciiva.com/2519/pyu-r-int-thick-7-2519781.pdf?src-supplier=Digikey, ComponentLink4Description=https://datasheet.ciiva.com/2519/pyu-r-int-thick-7-2519782.pdf?src-supplier=Digikey, ComponentLink4URL=https://datasheet.ciiva.com/2519/pyu-r-int-thick-7-2519782.pdf?src-supplier=Digikey, ComponentLink5Description=https://datasheet.ciiva.com/5596/rc0805-5596057.pdf?src-supplier=Mouser, ComponentLink5URL=https://datasheet.ciiva.com/5596/rc0805-5596057.pdf?src-supplier=Mouser, ComponentLink6Description=https://datasheet.ciiva.com/17033/rc0805-17033654.pdf?src-supplier=Future+Electronics, ComponentLink6URL=https://datasheet.ciiva.com/17033/rc0805-17033654.pdf?src-supplier=Future+Electronics, Construction=Chip, JESD-609 Code=e3, Mounting Technology="Surface Mount", Packaging="Tape and Reel", Pins=2, Pricing="5000=0.0021, 20000=0.002, 100000=0.0019, 200000=0.0018, 625000=0.0017 (USD)", Reach SVHC Compliant=Yes, RoHS=Yes, RoHS Compliant=Yes, Stock=70000, Supplier="Future Electronics", Technology="METAL GLAZE/THICK FILM", Terminal Finish=Nickel, Termination=Wraparound
R12: library part "RES 142K 0.1% 1/8W 0805", "Fixed Resistor, Thin Film, 0.125W, 142000ohm, 150V, 0.1% +/-Tol, 25ppm/Cel, Surface Mount, 0805"
R13: library part "RES 13m 0.5% 0.5W 0805", "Resistor Thick Film 0.013Ohm 0.5% 0.5W 2-Pin 0805 T/R", Manufacturer=Panasonic, Manufacturer Part Number=ERJ-6CWDR013V, Supplier Part Number=667-ERJ-6CWDR013V, Category="Chip SMD Resistors", ComponentLink1Description=https://industrial.panasonic.com/cdbs/www-data/pdf/RDN0000/AOA0000C313.pdf?src-supplier=Digikey, ComponentLink1URL=https://industrial.panasonic.com/cdbs/www-data/pdf/RDN0000/AOA0000C313.pdf?src-supplier=Digikey, ComponentLink2Description=https://datasheet.octopart.com/ERJ-6CWDR013V-Panasonic-datasheet-136473239.pdf?src-supplier=Electro+Sonic, ComponentLink2URL=https://datasheet.octopart.com/ERJ-6CWDR013V-Panasonic-datasheet-136473239.pdf?src-supplier=Electro+Sonic, Pricing="1=0.6, 10=0.275, 50=0.275, 100=0.219, 1000=0.149, 10000=0.128 (USD)", RoHS=No, Stock=7014, Supplier=Mouser
R14: library part "RES 41.2K 1% 0.125W 0805", "Fixed Resistor, Metal Glaze/thick Film, 0.125W, 41200ohm, 150V, 1% +/-Tol, 100ppm/Cel, Surface Mount, 0805"
R15: library part "RES 18.7k 1% 0.125W 0805", "Fixed Resistor, Metal Glaze/thick Film, 0.125W, 18700ohm, 150V, 1% +/-Tol, 100ppm/Cel, Surface Mount, 0805"
R16: library part "RES 3.9k 1% 0.125W 0805", "Fixed Resistor, Metal Glaze/thick Film, 0.125W, 3920ohm, 150V, 1% +/-Tol, 100ppm/Cel, Surface Mount, 0805"
R17: library part "RES 3.9k 1% 0.125W 0805", "Fixed Resistor, Metal Glaze/thick Film, 0.125W, 3920ohm, 150V, 1% +/-Tol, 100ppm/Cel, Surface Mount, 0805", Case/Package=0805, Manufacturer="Stackpole Electronics", Manufacturer Part Number=RMCF0805FT3K92, Max Operating Temperature=155°C, Min Operating Temperature=-55°C, Package Height=0.5mm, Package Length=2mm, Package Shape=Rectangular, Package Width=1.25mm, Power=125mW, Rated Temperature=70°C, Resistor Type="FIXED RESISTOR", Supplier Part Number=RMCF0805FT3K92CT-ND, Temperature Coefficient (ppm/Cel)=100, Tolerance=1%, Working Voltage=150V, Category="Chip SMD Resistors", ComponentLink1Description=https://datasheet.ciiva.com:443/pdfs/VipMasterIC/IC/SEIE/SEIE-S-A0009541969/SEIE-S-A0009541969-1.pdf?src-supplier=IHS+Markit, ComponentLink1URL=https://datasheet.ciiva.com:443/pdfs/VipMasterIC/IC/SEIE/SEIE-S-A0009541969/SEIE-S-A0009541969-1.pdf?src-supplier=IHS+Markit, ComponentLink2Description=https://datasheet.ciiva.com/3882/40960751s7172021n1174-3882844.pdf?src-supplier=Arrow+Electronics, ComponentLink2URL=https://datasheet.ciiva.com/3882/40960751s7172021n1174-3882844.pdf?src-supplier=Arrow+Electronics, ComponentLink3Description=https://datasheet.ciiva.com/15193/getdatasheetpartid-565526-15193591.pdf?src-supplier=Verical, ComponentLink3URL=https://datasheet.ciiva.com/15193/getdatasheetpartid-565526-15193591.pdf?src-supplier=Verical, Construction=Rectangular, JESD-609 Code=e3, Mounting Technology="Surface Mount", Packaging="Tape and Reel", Pins=2, Pricing="1=0.1, 10=0.021, 50=0.0128, 100=0.0105, 500=0.00704, 1000=0.00602 (USD)", Reach SVHC Compliant=Yes, Reference Standard=AEC-Q200, RoHS=Yes, RoHS Compliant=Yes, Stock=141516, Supplier=Digikey, Technology="METAL GLAZE/THICK FILM", Terminal Finish=Nickel, Termination=Wraparound
R18: library part "RES 18.7k 1% 0.125W 0805", "Fixed Resistor, Metal Glaze/thick Film, 0.125W, 18700ohm, 150V, 1% +/-Tol, 100ppm/Cel, Surface Mount, 0805", Case/Package=0805, Manufacturer="Stackpole Electronics", Manufacturer Part Number=RMCF0805FT18K7, Max Operating Temperature=155°C, Min Operating Temperature=-55°C, Package Height=0.5mm, Package Length=2mm, Package Shape=Rectangular, Package Width=1.25mm, Power=125mW, Rated Temperature=70°C, Resistor Type="FIXED RESISTOR", Supplier Part Number=RMCF0805FT18K7CT-ND, Temperature Coefficient (ppm/Cel)=100, Tolerance=1%, Working Voltage=150V, Category="Chip SMD Resistors", ComponentLink1Description=https://datasheet.ciiva.com:443/pdfs/VipMasterIC/IC/SEIE/SEIE-S-A0009541969/SEIE-S-A0009541969-1.pdf?src-supplier=IHS+Markit, ComponentLink1URL=https://datasheet.ciiva.com:443/pdfs/VipMasterIC/IC/SEIE/SEIE-S-A0009541969/SEIE-S-A0009541969-1.pdf?src-supplier=IHS+Markit, ComponentLink2Description=http://components.arrow.com/part/dataview/50586056S357577N1174?src-supplier=Arrow+Electronics, ComponentLink2URL=http://components.arrow.com/part/dataview/50586056S357577N1174?src-supplier=Arrow+Electronics, ComponentLink3Description=https://www.seielect.com/catalog/sei-rmcf_rmcp.pdf?src-supplier=Digikey, ComponentLink3URL=https://www.seielect.com/catalog/sei-rmcf_rmcp.pdf?src-supplier=Digikey, ComponentLink4Description=https://www.seielect.com/catalog/SEI-RMCF_RMCP.pdf?src-supplier=Avnet, ComponentLink4URL=https://www.seielect.com/catalog/SEI-RMCF_RMCP.pdf?src-supplier=Avnet, ComponentLink5Description=https://datasheet.octopart.com/RMCF0805FT18K7-Stackpole-Electronics-datasheet-28504820.pdf?src-supplier=Future+Electronics, ComponentLink5URL=https://datasheet.octopart.com/RMCF0805FT18K7-Stackpole-Electronics-datasheet-28504820.pdf?src-supplier=Future+Electronics, Construction=Rectangular, JESD-609 Code=e3, Mounting Technology="Surface Mount", Packaging="Tape and Reel", Pins=2, Pricing="1=0.1, 10=0.025, 100=0.012, 1000=0.00628, 2500=0.00538 (USD)", Reach SVHC Compliant=Yes, Reference Standard=AEC-Q200, RoHS=Yes, RoHS Compliant=Yes, Stock=214137, Supplier=Digikey, Technology="METAL GLAZE/THICK FILM", Terminal Finish=Nickel, Termination=Wraparound